# Altium PCB VESC_BMS.PcbDoc (part 4 of 4)
Units mm, origin at the board's own origin, x right, y up, seen from the top; angles counter-clockwise.
Board outline 100 x 75 mm, 4 copper layers (L1, L2, L3, L4), stack 1.446 mm thick; 263 components, 195 nets, 808 pads, 1031 vias.
Unrouted connection lines stored in the file: 1.
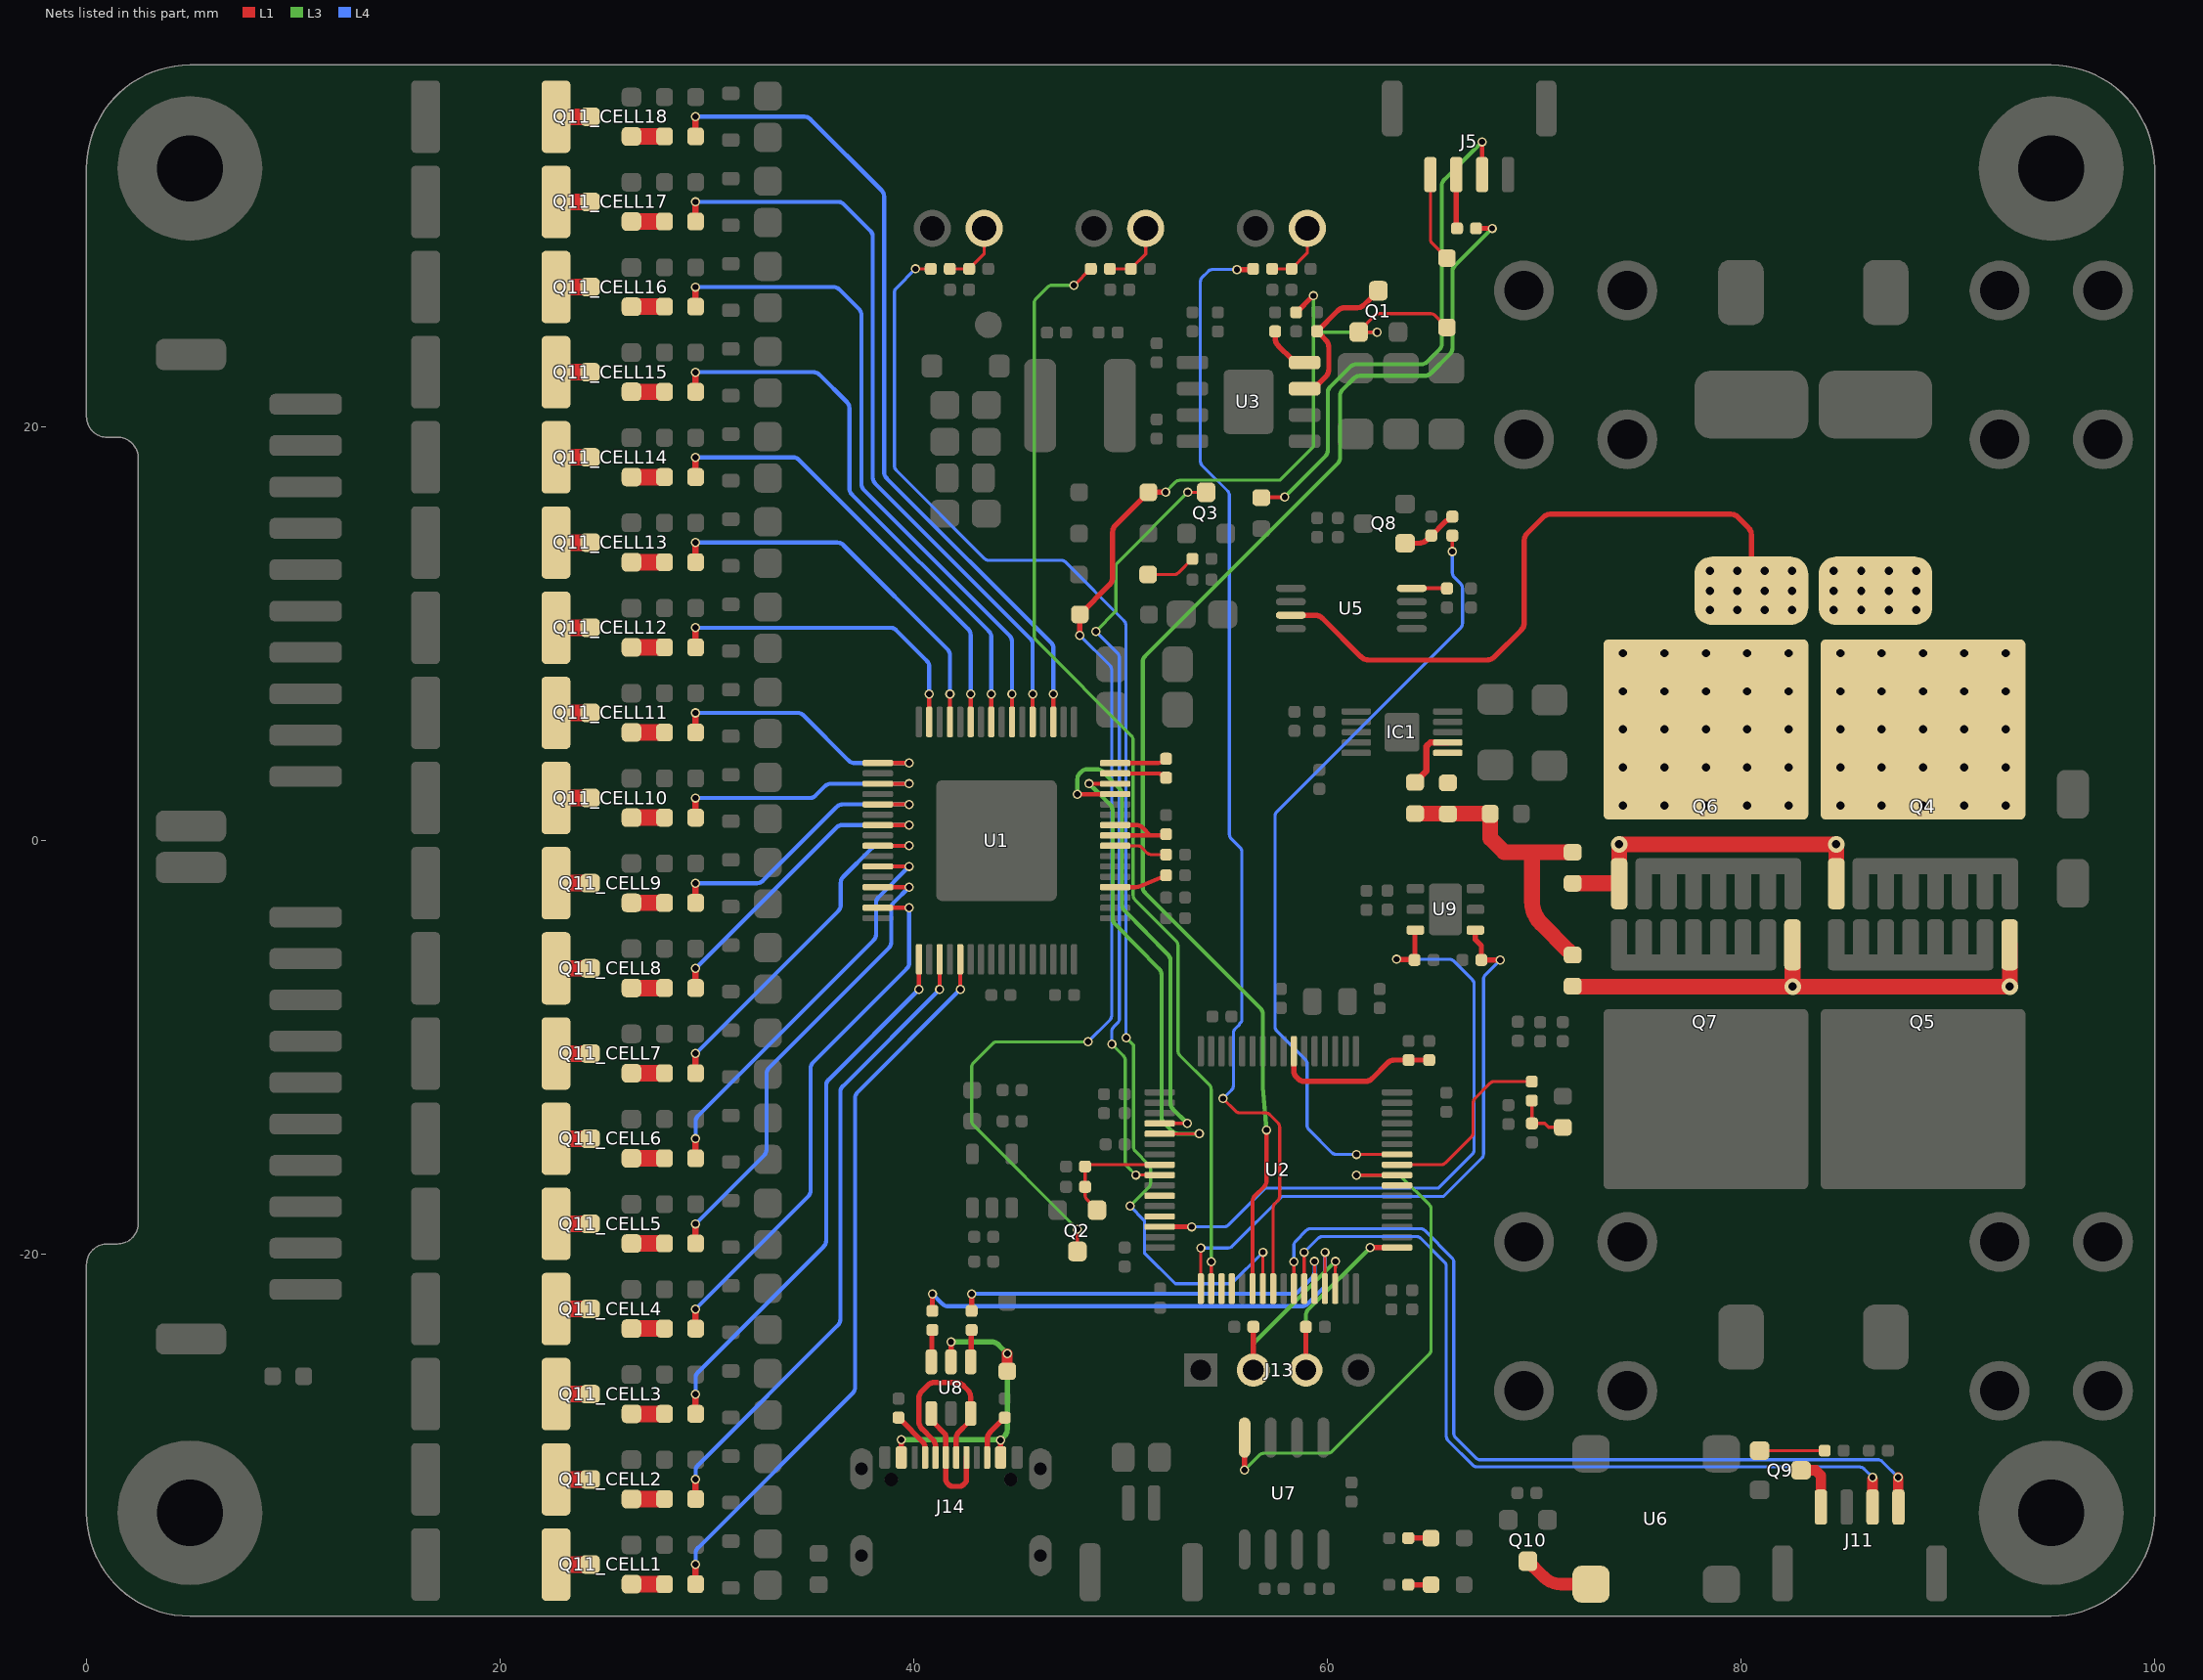
[diagram p5: the nets of this part, all layers, seen from the top]

## Via types
v1: diameter 0.8, hole 0.4, L1 to L4, tented both sides, 496 vias
v2: diameter 0.45, hole 0.3, L1 to L4, tented both sides, 449 vias
v3: diameter 0.6, hole 0.4, L1 to L4, tented both sides, 84 vias
v4: diameter 0.55, hole 0.3, L1 to L4, tented both sides, 2 vias

## Nets (pads, with @x,y where several pads share a name; then routed paths per layer and width w, separated by ;. In a path a pad name is that pad's centre, name@x,y a point inside that pad or via, vN(x,y) a via of type N, cw(c..) or ccw(c..) an arc to the next point about the centre after c; other vN are vias at no path point) (continued)
NetD2_2: D2.2 D4.1 D5.1 Q1.G Q2.D R22.1 | length 72.4
  L1 w0.152: Q2.D@47.909,-19.864 v2(47.909,-18.789) ; Q1.G@61.515,24.588 61.74,24.58 v2(62.41,24.58) ; Q1.G@61.515,24.613 62.289,25.386 cw(c62.503,25.17) 62.503,25.475 64.994,25.475 cw(c64.994,25.17) 65.209,25.386 65.567,25.028 D4.1@65.78,24.815
  L1 w0.254: v2(48.031,9.922) D5.1@48.031,10.934 49.465,12.369 ccw(c49.105,12.727) 49.613,12.727 49.613,14.895 cw(c50.121,14.895) 49.761,15.253 D2.2@51.351,16.843 51.563,16.846 52.117,16.846 ccw(c52.115,17.354) v2(52.176,16.85) ; R22.1@58.49,25.542 58.503,25.542 59.303,26.342 v2(59.328,26.342)
  L3 w0.152: v2(47.909,-18.789) 42.889,-13.768 cw(c43.105,-13.553) 42.8,-13.553 42.8,-10.952 cw(c43.105,-10.952) 42.889,-10.737 43.809,-9.817 cw(c44.023,-10.033) 44.023,-9.729 v2(48.424,-9.729) ; v2(52.176,16.85) 52.663,17.337 cw(c52.878,17.121) 52.878,17.425 57.699,17.425 59.328,19.054 59.328,24.58 ; v2(59.328,26.342) 59.328,24.58 ; v2(62.41,24.58) 59.328,24.58
  L4 w0.152: v2(48.031,9.922) 49.483,8.47 cw(c49.267,8.255) 49.571,8.255 49.571,-8.455 cw(c49.267,-8.455) 49.483,-8.67 v2(48.424,-9.729)
NetD3_2: D3.2 R27.1 | length 2.4
  L1 w0.152: D3.2@51.331,12.866 52.59,12.866 ccw(c52.59,13.17) 52.804,12.954 R27.1@53.476,13.625
NetD4_2: D4.2 J5.4 | length 4.4
  L1 w0.152: J5.4@64.983,32.2 64.983,29.089 ccw(c65.288,29.089) 65.071,28.874 65.567,28.378 D4.2@65.78,28.165
NetD10_2: D10.2 R50.1 | length 1.1
  L1 w0.254: R50.1@63.911,-33.725 D10.2@65.011,-33.725
NetD11_2: D11.2 R51.1 | length 1.1
  L1 w0.254: R51.1@63.911,-35.978 D11.2@65.011,-35.978
NetIC1_6: IC1.6 R38.1
NetIC1_7: IC1.7 R37.1 | length 3.1
  L1 w0.305: R37.1@64.239,2.811 64.242,2.811 64.519,3.088 64.519,3.09 64.797,3.368 64.797,4.564 64.975,4.743 IC1.7@65.823,4.743
NetJ5_3: J5.3 R45.2 | length 2.7
  L1 w0.254: R45.2@66.233,29.601 J5.3@66.233,32.2 J5.3@66.233,32.3
NetJ6_2: J6.2 R14.1 R15.1 | length 3.2
  L1 w0.152: R14.1@57.332,27.64 58.269,27.64 59.028,28.399 J6.2@59.028,29.6
NetJ7_2: J7.2 R10.1 R11.1 | length 3.3
  L1 w0.152: R10.1@49.485,27.645 R11.1@50.498,27.645 51.215,28.363 J7.2@51.215,29.6
NetJ9_2: J9.2 R12.1 R13.1 | length 3.2
  L1 w0.152: R12.1@41.742,27.645 R13.1@42.682,27.645 43.402,28.365 J9.2@43.402,29.6
NetJ11_1: J11.1 Q9.D | length 2.6
  L1 w0.508: Q9.D@82.903,-30.446 83.601,-30.446 83.861,-30.706 J11.1@83.861,-32.225
NetJ11_3: J11.3 U2.43 | length 40.6
  L1 w0.152: U2.43@58.881,-21.661 v2(58.881,-19.9)
  L1 w0.508: J11.3@86.361,-32.225 v2@86.361,-30.864
  L4 w0.152: v2(58.881,-19.9) 59.551,-19.23 cw(c59.766,-19.447) 59.766,-19.142 64.3,-19.142 cw(c64.3,-19.447) 64.516,-19.231 65.661,-20.376 cw(c65.444,-20.59) 65.749,-20.59 65.749,-28.785 ccw(c66.053,-28.785) 65.837,-29 67.031,-30.194 ccw(c67.245,-29.977) 67.245,-30.282 85.725,-30.282 cw(c85.725,-30.587) 85.94,-30.371 v2(86.361,-30.792)
NetJ11_4: J11.4 U2.42 | length 43
  L1 w0.152: v2(58.379,-20.354) 58.379,-20.364 cw(c57.98,-20.386) 58.38,-20.386 58.38,-21.023 U2.42@58.381,-21.661
  L1 w0.508: v2(87.602,-30.792) 87.602,-32.216 J11.4@87.611,-32.225
  L4 w0.152: v2(58.379,-20.354) 58.379,-19.577 cw(c58.684,-19.577) 58.467,-19.362 58.975,-18.855 cw(c59.189,-19.071) 59.189,-18.767 64.497,-18.767 cw(c64.497,-19.071) 64.712,-18.856 66.022,-20.165 cw(c65.805,-20.38) 66.11,-20.38 66.11,-28.651 ccw(c66.415,-28.651) 66.198,-28.866 67.178,-29.845 ccw(c67.392,-29.628) 67.392,-29.933 86.618,-29.933 cw(c86.618,-30.238) 86.833,-30.022 v2(87.602,-30.792)
NetJ14_4: J14.4 R54.1 | length 2.5
  L1 w0.254: R54.1@39.263,-27.9 39.402,-28.039 40.401,-29.039 cw(c40.042,-29.398) 40.55,-29.398 40.55,-29.402 J14.4@40.55,-29.925
NetJ14_5: J14.5 J14.7 U8.3 | length 9.6
  L1 w0.254: J14.5@41.05,-29.825 41.05,-29.402 41.05,-29.302 ccw(c40.542,-29.302) 40.901,-28.943 40.397,-28.439 cw(c40.758,-28.081) 40.25,-28.081 40.25,-26.969 cw(c40.758,-26.969) 40.398,-26.61 40.662,-26.347 cw(c41.02,-26.707) 41.02,-26.199 42.034,-26.199 cw(c42.034,-26.707) 42.394,-26.348 42.601,-26.555 cw(c42.242,-26.914) 42.75,-26.914 42.75,-27.237 U8.3@42.75,-27.7 42.612,-28.163 42.198,-28.577 ccw(c42.558,-28.935) 42.05,-28.935 J14.7@42.05,-29.825
NetJ14_6: J14.6 J14.8 U8.1 | length 5.9
  L1 w0.254: U8.1@40.85,-27.7 40.987,-28.163 41.461,-28.636 cw(c41.245,-28.851) 41.55,-28.851 41.55,-29.451 J14.6@41.55,-29.825 41.55,-30.879 ccw(c41.855,-30.879) 41.638,-31.094 41.681,-31.136 ccw(c41.896,-30.92) 41.896,-31.225 42.199,-31.225 ccw(c42.199,-30.92) 42.414,-31.136 42.461,-31.089 ccw(c42.245,-30.874) 42.55,-30.874 J14.8@42.55,-29.825
NetJ14_10: J14.10 R57.1 | length 2.3
  L1 w0.254: J14.10@43.55,-29.825 43.55,-28.96 cw(c44.058,-28.96) 43.698,-28.602 R57.1@44.4,-27.9
NetQ1_D: Q1.D R23.1 U3.3 | length 7.4
  L1 w0.254: U3.3@58.9,21.846 59.5,22.009 59.924,22.433 ccw(c59.564,22.791) 60.072,22.791 60.072,23.843 ccw(c59.564,23.843) 59.923,24.202 59.639,24.486 R23.1@59.5,24.625 60.494,25.62 cw(c60.853,25.26) 60.853,25.768 61.435,25.768 ccw(c61.435,26.276) 61.793,25.916 Q1.D@62.465,26.588
NetQ2_G: Q2.G R29.1 R31.2 U2.24 | length 6
  L1 w0.152: Q2.G@48.859,-17.864 48.634,-17.614 48.375,-17.354 cw(c48.591,-17.139) 48.286,-17.139 R31.2@48.286,-16.739 48.286,-16.599 48.286,-15.899 R29.1@48.286,-15.76 48.425,-15.673 U2.24@51.893,-15.673
NetQ3_D: Q3.D U2.25 | length 37.9
  L1 w0.152: v2(50.734,-16.165) 50.738,-16.169 51.889,-16.169 U2.25@51.893,-16.173 ; v2(53.256,16.84) 54.133,16.84 Q3.D@54.136,16.843
  L3 w0.152: v2(48.802,10.12) 49.779,11.097 49.779,13.236 cw(c50.084,13.236) 49.868,13.451 v2(53.256,16.84) ; v2(49.576,-9.843) 50.141,-10.408 cw(c49.924,-10.623) 50.229,-10.623 50.229,-15.534 ccw(c50.534,-15.534) 50.318,-15.749 v2(50.734,-16.165)
  L4 w0.152: v2(48.802,10.12) 49.855,9.067 cw(c49.638,8.852) 49.943,8.852 49.943,-8.614 cw(c49.638,-8.614) 49.855,-8.829 49.664,-9.019 ccw(c49.881,-9.234) 49.576,-9.234 v2(49.576,-9.843)
NetQ4_G: Q4.G Q6.G R34.2 | length 16.6
  L1 w0.762: R34.2@71.859,-2.064 74.09,-2.064 Q6.G@74.109,-2.083 ; Q6.G@74.109,-2.086 Q6.G@74.109,-2.083 ; Q4.G@84.601,-2.078 v1(84.601,-0.175) v1(74.109,-0.175) Q6.G@74.109,-2.083
NetQ5_G: Q5.G Q7.G R35.2 | length 25.3
  L1 w0.508: Q7.G@82.491,-5.041 Q7.G@82.495,-5.045 ; v1@82.495,-7.05 v1(82.499,-7.054) ; Q5.G@92.991,-5.041 92.995,-5.045 Q5.G@93.06,-5.11 ; v1@92.995,-7.054 v1(92.999,-7.058)
  L1 w0.762: R35.2@71.842,-7.057 71.84,-7.054 v1(82.499,-7.054) v1@92.995,-7.054 ; v1@82.495,-7.05 Q7.G@82.495,-5.045 ; v1@92.995,-7.054 Q5.G@92.995,-5.045
  L3 w0.508: v1@92.995,-7.054 v1(92.999,-7.058)
NetQ8_G: Q8.G R42.1 R43.1 | length 2.8
  L1 w0.254: Q8.G@63.754,14.38 64.437,14.38 ccw(c64.437,14.888) 64.78,14.514 64.886,14.611 R43.1@65.026,14.745 65.666,15.386 cw(c66.024,15.026) 65.829,15.495 65.905,15.526 R42.1@66.044,15.665
NetQ9_G: Q9.G R47.2 | length 3.1
  L1 w0.152: Q9.G@80.903,-29.496 R47.2@84.045,-29.496
NetQ10_D: Q10.D U6.2 | length 3.5
  L1 w0.6: Q10.D@69.698,-34.842 69.848,-35.017 69.849,-35.018 cw(c69.157,-35.998) 70.004,-35.148 70.455,-35.599 ccw(c71.303,-34.75) 71.303,-35.95 U6.2@72.75,-35.95
NetQ11_CELL1_D: Q11_CELL1.D R60_CELL1.2 | length 1.6
  L1 w0.8: R60_CELL1.2@22.7,-35 Q11_CELL1.D@24.35,-35
NetQ11_CELL1_G: Q11_CELL1.G R59_CELL1.1 | length 1.5
  L1 w0.8: Q11_CELL1.G@26.35,-35.95 R59_CELL1.1@27.898,-35.95
NetQ11_CELL2_D: Q11_CELL2.D R60_CELL2.2 | length 1.6
  L1 w0.8: R60_CELL2.2@22.7,-30.882 Q11_CELL2.D@24.35,-30.882
NetQ11_CELL2_G: Q11_CELL2.G R59_CELL2.1 | length 1.5
  L1 w0.8: Q11_CELL2.G@26.35,-31.832 R59_CELL2.1@27.898,-31.832
NetQ11_CELL3_D: Q11_CELL3.D R60_CELL3.2 | length 1.6
  L1 w0.8: R60_CELL3.2@22.7,-26.765 Q11_CELL3.D@24.35,-26.765
NetQ11_CELL3_G: Q11_CELL3.G R59_CELL3.1 | length 1.5
  L1 w0.8: Q11_CELL3.G@26.35,-27.715 R59_CELL3.1@27.898,-27.715
NetQ11_CELL4_D: Q11_CELL4.D R60_CELL4.2 | length 1.6
  L1 w0.8: R60_CELL4.2@22.7,-22.647 Q11_CELL4.D@24.35,-22.647
NetQ11_CELL4_G: Q11_CELL4.G R59_CELL4.1 | length 1.5
  L1 w0.8: Q11_CELL4.G@26.35,-23.597 R59_CELL4.1@27.898,-23.597
NetQ11_CELL5_D: Q11_CELL5.D R60_CELL5.2 | length 1.6
  L1 w0.8: R60_CELL5.2@22.7,-18.529 Q11_CELL5.D@24.35,-18.529
NetQ11_CELL5_G: Q11_CELL5.G R59_CELL5.1 | length 1.5
  L1 w0.8: Q11_CELL5.G@26.35,-19.479 R59_CELL5.1@27.898,-19.479
NetQ11_CELL6_D: Q11_CELL6.D R60_CELL6.2 | length 1.6
  L1 w0.8: R60_CELL6.2@22.7,-14.412 Q11_CELL6.D@24.35,-14.412
NetQ11_CELL6_G: Q11_CELL6.G R59_CELL6.1 | length 1.5
  L1 w0.8: Q11_CELL6.G@26.35,-15.362 R59_CELL6.1@27.898,-15.362
NetQ11_CELL7_D: Q11_CELL7.D R60_CELL7.2 | length 1.6
  L1 w0.8: R60_CELL7.2@22.7,-10.294 Q11_CELL7.D@24.35,-10.294
NetQ11_CELL7_G: Q11_CELL7.G R59_CELL7.1 | length 1.5
  L1 w0.8: Q11_CELL7.G@26.35,-11.244 R59_CELL7.1@27.898,-11.244
NetQ11_CELL8_D: Q11_CELL8.D R60_CELL8.2 | length 1.6
  L1 w0.8: R60_CELL8.2@22.7,-6.176 Q11_CELL8.D@24.35,-6.176
NetQ11_CELL8_G: Q11_CELL8.G R59_CELL8.1 | length 1.5
  L1 w0.8: Q11_CELL8.G@26.35,-7.126 R59_CELL8.1@27.898,-7.126
NetQ11_CELL9_D: Q11_CELL9.D R60_CELL9.2 | length 1.6
  L1 w0.8: R60_CELL9.2@22.7,-2.059 Q11_CELL9.D@24.35,-2.059
NetQ11_CELL9_G: Q11_CELL9.G R59_CELL9.1 | length 1.5
  L1 w0.8: Q11_CELL9.G@26.35,-3.009 R59_CELL9.1@27.898,-3.009
NetQ11_CELL10_D: Q11_CELL10.D R60_CELL10.2 | length 1.6
  L1 w0.8: R60_CELL10.2@22.7,2.059 Q11_CELL10.D@24.35,2.059
NetQ11_CELL10_G: Q11_CELL10.G R59_CELL10.1 | length 1.5
  L1 w0.8: Q11_CELL10.G@26.35,1.109 R59_CELL10.1@27.898,1.109
NetQ11_CELL11_D: Q11_CELL11.D R60_CELL11.2 | length 1.6
  L1 w0.8: R60_CELL11.2@22.7,6.176 Q11_CELL11.D@24.35,6.176
NetQ11_CELL11_G: Q11_CELL11.G R59_CELL11.1 | length 1.5
  L1 w0.8: Q11_CELL11.G@26.35,5.226 R59_CELL11.1@27.898,5.226
NetQ11_CELL12_D: Q11_CELL12.D R60_CELL12.2 | length 1.6
  L1 w0.8: R60_CELL12.2@22.7,10.294 Q11_CELL12.D@24.35,10.294
NetQ11_CELL12_G: Q11_CELL12.G R59_CELL12.1 | length 1.6
  L1 w0.8: Q11_CELL12.G@26.35,9.344 R59_CELL12.1@27.948,9.344
NetQ11_CELL13_D: Q11_CELL13.D R60_CELL13.2 | length 1.6
  L1 w0.8: R60_CELL13.2@22.7,14.412 Q11_CELL13.D@24.35,14.412
NetQ11_CELL13_G: Q11_CELL13.G R59_CELL13.1 | length 1.6
  L1 w0.8: Q11_CELL13.G@26.35,13.462 R59_CELL13.1@27.948,13.462
NetQ11_CELL14_D: Q11_CELL14.D R60_CELL14.2 | length 1.6
  L1 w0.8: R60_CELL14.2@22.7,18.529 Q11_CELL14.D@24.35,18.529
NetQ11_CELL14_G: Q11_CELL14.G R59_CELL14.1 | length 1.6
  L1 w0.8: Q11_CELL14.G@26.35,17.579 R59_CELL14.1@27.948,17.579
NetQ11_CELL15_D: Q11_CELL15.D R60_CELL15.2 | length 1.6
  L1 w0.8: R60_CELL15.2@22.7,22.647 Q11_CELL15.D@24.35,22.647
NetQ11_CELL15_G: Q11_CELL15.G R59_CELL15.1 | length 1.6
  L1 w0.8: Q11_CELL15.G@26.35,21.697 R59_CELL15.1@27.948,21.697
NetQ11_CELL16_D: Q11_CELL16.D R60_CELL16.2 | length 1.6
  L1 w0.8: R60_CELL16.2@22.7,26.765 Q11_CELL16.D@24.35,26.765
NetQ11_CELL16_G: Q11_CELL16.G R59_CELL16.1 | length 1.6
  L1 w0.8: Q11_CELL16.G@26.35,25.815 R59_CELL16.1@27.948,25.815
NetQ11_CELL17_D: Q11_CELL17.D R60_CELL17.2 | length 1.6
  L1 w0.8: R60_CELL17.2@22.7,30.882 Q11_CELL17.D@24.35,30.882
NetQ11_CELL17_G: Q11_CELL17.G R59_CELL17.1 | length 1.6
  L1 w0.8: Q11_CELL17.G@26.35,29.932 R59_CELL17.1@27.948,29.932
NetQ11_CELL18_D: Q11_CELL18.D R60_CELL18.2 | length 1.6
  L1 w0.8: R60_CELL18.2@22.7,35 Q11_CELL18.D@24.35,35
NetQ11_CELL18_G: Q11_CELL18.G R59_CELL18.1 | length 1.6
  L1 w0.8: Q11_CELL18.G@26.35,34.05 R59_CELL18.1@27.948,34.05
NetR2_2: R2.2 U1.52 | length 2.6
  L1 w0.2: U1.52@49.738,-2.25 50.727,-2.25 ccw(c50.727,-1.742) 50.922,-2.211 52.061,-1.74 R2.2@52.2,-1.677
NetR4_2: R4.2 U1.56 | length 2.6
  L1 w0.152: U1.56@49.738,-0.25 50.814,-0.25 cw(c50.814,-0.555) 51.029,-0.339 51.278,-0.588 ccw(c51.493,-0.372) 51.493,-0.677 R4.2@52.2,-0.677
NetR5_2: R5.2 U1.57 U1.58 | length 4.4
  L1 w0.2: U1.57@49.738,0.25 51.44,0.25 ; U1.58@49.738,0.75 50.376,0.75 50.774,0.75 cw(c50.774,0.35) 51.056,0.634 51.44,0.25 ; R5.2@52.2,0.311 52.139,0.25 51.44,0.25
NetR6_1: R6.1 U1.63 | length 2.5
  L1 w0.2: U1.63@49.738,3.25 50.349,3.25 51.767,3.25 cw(c51.767,2.742) 51.956,3.213 52.061,3.171 R6.1@52.2,3.04
NetR6_2: R6.2 U1.64 | length 2.5
  L1 w0.2: U1.64@49.738,3.75 51.767,3.75 ccw(c51.767,4.258) 51.957,3.787 52.061,3.829 R6.2@52.2,3.96
NetR8_1: R8.1 R9.1 R16.2 | length 2.7
  L1 w0.152: R8.1@69.883,-12.57 69.889,-12.575 69.889,-13.668 R9.1@69.894,-13.673 70.508,-13.673 70.696,-13.862 R16.2@71.383,-13.862
NetR8_2: R8.2 U2.57 | length 9.1
  L1 w0.152: U2.57@63.369,-15.673 65.484,-15.673 ccw(c65.484,-15.368) 65.699,-15.584 66.96,-14.323 ccw(c66.744,-14.109) 67.049,-14.109 67.049,-12.677 cw(c67.353,-12.677) 67.137,-12.462 67.861,-11.738 cw(c68.075,-11.955) 68.075,-11.65 R8.2@69.883,-11.65
NetR10_2: R10.2 U2.34 | length 54.6
  L1 w0.152: v2(47.746,26.852) 47.759,26.852 48.552,27.645 R10.2@48.565,27.645 ; U2.34@54.381,-21.661 v2(54.381,-20.354)
  L3 w0.152: v2(47.746,26.852) 46.684,26.852 ccw(c46.684,26.547) 46.469,26.763 45.914,26.208 ccw(c46.13,25.993) 45.825,25.993 45.825,9.905 ccw(c46.13,9.905) 45.914,9.69 50.518,5.086 cw(c50.302,4.871) 50.607,4.871 50.607,-2.643 ccw(c50.911,-2.643) 50.695,-2.857 52.685,-4.848 cw(c52.469,-5.063) 52.774,-5.063 52.774,-10.162 ccw(c53.079,-10.162) 52.862,-10.377 54.292,-11.807 cw(c54.076,-12.022) 54.381,-12.022 v2(54.381,-20.354)
NetR12_2: R12.2 U2.39 | length 65.4
  L1 w0.152: v2(40.086,27.644) R12.2@40.822,27.645 ; U2.39@56.881,-21.661 v2(56.881,-19.9)
  L3 w0.152: v2(50.265,-9.526) 50.625,-9.885 50.625,-14.812 ccw(c50.93,-14.812) 50.714,-15.027 51.361,-15.675 cw(c51.145,-15.89) 51.45,-15.89 51.45,-16.554 cw(c51.145,-16.554) 51.361,-16.769 v2(50.458,-17.673)
  L4 w0.152: v2(40.086,27.644) 39.151,26.709 ccw(c39.367,26.494) 39.062,26.494 39.062,18.126 ccw(c39.367,18.126) 39.151,17.911 43.421,13.64 ccw(c43.636,13.857) 43.636,13.552 47.122,13.552 cw(c47.122,13.247) 47.337,13.463 50.166,10.635 cw(c49.95,10.42) 50.255,10.42 50.255,-9.446 ccw(c50.559,-9.445) v2(50.265,-9.526) ; v2(50.458,-17.673) 51.154,-18.37 51.154,-19.936 52.646,-21.428 55.353,-21.428 v2(56.881,-19.9)
NetR14_2: R14.2 U2.40 | length 54.7
  L1 w0.152: v2(54.956,-12.475) 55.56,-13.079 ccw(c55.775,-12.863) 55.775,-13.168 57.01,-13.168 cw(c57.01,-13.473) 57.224,-13.257 57.601,-13.633 cw(c57.385,-13.848) 57.69,-13.848 57.69,-17.19 cw(c57.385,-17.19) 57.601,-17.405 57.47,-17.536 ; U2.40@57.381,-21.661 57.381,-17.751 cw(c57.686,-17.751) 57.47,-17.536
  L1 w0.254: v2(55.626,27.612) R14.2@56.412,27.612
  L4 w0.152: v2(54.956,-12.475) 55.367,-12.065 ccw(c55.151,-11.85) 55.455,-11.85 55.455,-9.31 cw(c55.76,-9.31) 55.544,-9.095 55.748,-8.891 55.748,-8.857 55.845,-8.759 ccw(c55.562,-8.646) 55.867,-8.646 55.867,-0.549 ccw(c55.562,-0.549) 55.778,-0.334 55.353,0.091 cw(c55.569,0.306) 55.264,0.306 55.264,16.693 ccw(c54.959,16.693) 55.176,16.907 53.946,18.137 cw(c54.162,18.352) 53.857,18.352 53.857,27.019 cw(c54.162,27.019) 53.945,27.234 54.236,27.524 cw(c54.451,27.307) 54.451,27.612 v2(55.626,27.612)
NetR25_2: R25.2 U3.4 | length 2.3
  L1 w0.254: R25.2@57.474,24.622 57.474,24.292 ccw(c57.982,24.292) 57.622,23.933 58.29,23.265 ccw(c58.649,23.624) 58.3,23.256 U3.4@58.9,23.116
NetR34_1: R34.1 R35.1 R37.2 R38.2 R39.2 | length 14.8
  L1 w0.762: R37.2@64.239,1.307 64.29,1.298 65.78,1.298 R38.2@65.83,1.289 ; R38.2@65.84,1.298 R39.2@67.873,1.298 67.873,0.114 68.547,-0.56 69.894,-0.56 ; R35.1@71.859,-5.531 71.809,-5.509 ccw(c70.569,-6.395) 71.648,-5.319 70.339,-4.01 cw(c71.418,-2.934) 69.894,-2.934 69.894,-0.56 ; R34.1@71.859,-0.56 69.894,-0.56
NetR41_1: R41.1 U5.8 | length 1.7
  L1 w0.2: U5.8@64.084,12.198 R41.1@65.78,12.198
NetR42_2: R42.2 U2.58 | length 38
  L1 w0.152: v2(61.407,-15.173) U2.58@63.369,-15.173 ; v2(66.044,13.977) R42.2@66.044,14.745
  L4 w0.152: v2(61.407,-15.173) 60.428,-15.173 cw(c60.428,-14.868) 60.213,-15.085 59.106,-13.977 cw(c59.323,-13.763) 59.018,-13.763 59.018,-10.788 ccw(c58.713,-10.788) 58.929,-10.573 57.553,-9.197 cw(c57.77,-8.983) 57.465,-8.983 57.465,1.179 cw(c57.77,1.179) 57.554,1.394 66.443,10.283 ccw(c66.227,10.498) 66.531,10.498 66.531,12.207 ccw(c66.227,12.207) 66.442,12.423 66.134,12.731 cw(c66.349,12.947) 66.044,12.947 v2(66.044,13.977)
NetR45_1: R45.1 U2.38 | length 63.6
  L1 w0.2: U2.38@56.381,-21.661 56.381,-17.454 cw(c56.781,-17.454) 56.498,-17.172 56.944,-16.725 ccw(c56.661,-16.443) 57.061,-16.443 v2(57.061,-13.993)
  L1 w0.254: R45.1@67.19,29.601 v2(67.969,29.601)
  L3 w0.2: v2(57.061,-13.993) 56.882,-11.935 cw(c57.28,-11.902) 56.88,-11.902 56.88,-8.387 ccw(c56.48,-8.387) 56.763,-8.105 51.188,-2.529 cw(c51.471,-2.247) 51.071,-2.247 51.071,8.641 cw(c51.471,8.641) 51.188,8.923 60.498,18.234 ccw(c60.215,18.516) 60.615,18.516 60.615,21.518 cw(c61.015,21.518) 60.732,21.801 61.289,22.358 cw(c61.571,22.074) 61.571,22.474 64.716,22.474 ccw(c64.716,22.874) 64.999,22.591 65.932,23.524 ccw(c65.648,23.806) 66.048,23.806 66.048,27.515 cw(c66.448,27.515) 66.165,27.798 v2(67.969,29.601)
NetR55_1: R55.1 U8.6 | length 1.5
  L1 w0.254: U8.6@40.85,-25.2 40.875,-24.737 40.875,-23.799 R55.1@40.9,-23.66
NetR56_1: R56.1 U8.4 | length 1.5
  L1 w0.254: U8.4@42.75,-25.2 42.775,-24.737 42.775,-23.799 R56.1@42.8,-23.66
NetR61_1: R61.1 U2.33 U9.1 | length 29.7
  L1 w0.152: U2.33@53.881,-21.66 v2(53.88,-19.696)
  L1 w0.254: U9.1@67.156,-4.327 67.156,-4.786 67.446,-5.077 R61.1@67.446,-5.773 v2(68.349,-5.773)
  L4 w0.152: v2(53.88,-19.696) 55.193,-19.696 ccw(c55.193,-19.391) 55.408,-19.607 57.813,-17.203 65.617,-17.203 67.461,-15.359 ccw(c67.245,-15.144) 67.55,-15.144 67.55,-6.698 cw(c67.855,-6.698) 67.639,-6.483 v2(68.349,-5.773)
NetR62_1: R62.1 U2.30 U9.6 | length 31.4
  L1 w0.254: U2.30@51.893,-18.673 v2(53.438,-18.673) ; v2(63.353,-5.738) 63.37,-5.755 64.194,-5.755 R62.1@64.211,-5.773 64.233,-5.751 64.233,-4.349 U9.6@64.256,-4.327
  L4 w0.152: v2(53.438,-18.673) 54.998,-18.673 ccw(c54.998,-18.368) 55.213,-18.584 56.989,-16.808 65.363,-16.808 67.007,-15.165 ccw(c66.791,-14.95) 67.095,-14.95 67.095,-6.943 ccw(c66.791,-6.943) 67.007,-6.728 66.105,-5.827 ccw(c65.891,-6.043) 65.891,-5.738 v2(63.353,-5.738)
NetU2_29: U2.29
NetU2_35: U2.35
NetU2_36: U2.36
NetU2_56: U2.56 U7.8 | length 26.1
  L1 w0.152: v2(61.407,-16.173) U2.56@63.369,-16.173
  L1 w0.254: v2(55.998,-30.428) U7.8@55.998,-28.865
  L3 w0.152: v2(55.998,-30.428) 56.719,-29.707 cw(c56.933,-29.923) 56.933,-29.619 60.015,-29.619 ccw(c60.015,-29.314) 60.23,-29.53 64.921,-24.838 ccw(c64.705,-24.623) 65.01,-24.623 65.01,-17.807 ccw(c64.705,-17.807) 64.921,-17.592 63.591,-16.262 ccw(c63.376,-16.478) 63.376,-16.173 v2(61.407,-16.173)
PRECHARGEENABLE: U2.55
PUSHBUTTON: J5.2 R28.2 | length 25.7
  L1 w0.2: R28.2@56.806,16.581 56.826,16.6 57.921,16.6 v2(57.941,16.62) ; J5.2@67.483,32.3 v2(67.483,33.786)
  L3 w0.2: v2(57.941,16.62) 59.904,18.583 ccw(c59.62,18.865) 60.02,18.865 60.02,21.656 cw(c60.42,21.656) 60.137,21.939 61.112,22.913 cw(c61.394,22.63) 61.394,23.03 64.544,23.03 ccw(c64.544,23.43) 64.826,23.147 65.414,23.735 ccw(c65.131,24.017) 65.531,24.017 65.531,31.668 cw(c65.931,31.668) 65.647,31.951 v2(67.483,33.786)
R\S\T\: C12.2 R18.1 U2.7 | length 8.2
  L1 w0.254: U2.7@58.381,-10.185 58.381,-11.151 ccw(c58.781,-11.151) 58.498,-11.433 58.585,-11.52 ccw(c58.867,-11.237) 58.867,-11.637 61.859,-11.637 ccw(c61.859,-11.237) 62.141,-11.52 62.934,-10.727 cw(c63.217,-11.01) 63.217,-10.61 64.788,-10.61 R18.1@64.927,-10.61
S1: R59_CELL1.2 U1.37 | length 35.5
  L1 w0.2: v2(42.25,-7.194) U1.37@42.25,-5.738
  L1 w0.3: R59_CELL1.2@29.452,-35.95 v2(29.452,-35)
  L4 w0.2: v2(29.452,-35) 29.452,-34.477 cw(c29.852,-34.477) 29.569,-34.194 37.046,-26.717 ccw(c36.763,-26.434) 37.163,-26.434 37.163,-12.447 cw(c37.563,-12.447) 37.28,-12.164 v2(42.25,-7.194)
S2: R59_CELL2.2 U1.35 | length 30.9
  L1 w0.2: v2(41.25,-7.194) U1.35@41.25,-5.738
  L1 w0.3: R59_CELL2.2@29.452,-31.832 29.452,-31.601 v2(29.452,-30.882)
  L4 w0.2: v2(29.452,-30.882) 29.452,-30.475 cw(c29.852,-30.475) 29.569,-30.193 36.333,-23.429 ccw(c36.049,-23.146) 36.449,-23.146 36.449,-12.16 cw(c36.849,-12.16) 36.566,-11.878 v2(41.25,-7.194)
S3: R59_CELL3.2 U1.33 | length 26.3
  L1 w0.2: v2(40.25,-7.194) U1.33@40.25,-5.738
  L1 w0.3: R59_CELL3.2@29.452,-27.664 29.452,-27.484 29.452,-26.773 cw(c30.052,-26.776) v2(29.452,-26.765)
  L4 w0.2: v2(29.452,-26.765) 29.452,-25.985 cw(c29.852,-25.985) 29.569,-25.702 35.646,-19.625 ccw(c35.363,-19.343) 35.763,-19.343 35.763,-11.847 cw(c36.163,-11.847) 35.879,-11.565 v2(40.25,-7.194)
S4: R59_CELL4.2 U1.31 | length 26.1
  L1 w0.2: U1.31@38.262,-3.25 38.9,-3.248 39.445,-3.248 v2(39.781,-3.246)
  L1 w0.3: R59_CELL4.2@29.452,-23.597 29.452,-22.657 cw(c30.052,-22.659) v2(29.452,-22.647)
  L4 w0.2: v2(29.452,-22.647) 34.896,-17.203 ccw(c34.612,-16.921) 35.012,-16.921 35.012,-11.005 cw(c35.412,-11.005) 35.129,-10.723 39.662,-6.19 ccw(c39.379,-5.908) 39.779,-5.908 39.779,-3.285 cw(c40.179,-3.287) v2(39.781,-3.246)
S5: R59_CELL5.2 U1.29 | length 23
  L1 w0.2: U1.29@38.262,-2.25 v2(39.779,-2.25)
  L1 w0.3: R59_CELL5.2@29.452,-19.479 29.452,-19.249 v2(29.452,-18.529)
  L4 w0.2: v2(29.452,-18.529) 32.766,-15.215 ccw(c32.483,-14.932) 32.883,-14.932 32.883,-11.272 cw(c33.283,-11.272) 33,-10.99 38.793,-5.196 ccw(c38.51,-4.914) 38.91,-4.914 38.91,-3.284 cw(c39.31,-3.284) 39.027,-3.002 v2(39.779,-2.25)
S6: R59_CELL6.2 U1.27 | length 19.9
  L1 w0.2: U1.27@38.262,-1.25 v2(39.779,-1.25)
  L1 w0.3: R59_CELL6.2@29.452,-15.362 29.452,-15.131 v2(29.452,-14.412)
  L4 w0.2: v2(29.452,-14.412) 29.452,-13.588 cw(c29.852,-13.588) 29.569,-13.306 38.058,-4.817 ccw(c37.774,-4.535) 38.174,-4.535 38.174,-3.02 cw(c38.574,-3.02) 38.291,-2.738 v2(39.779,-1.25)
S7: R59_CELL7.2 U1.25 | length 17.7
  L1 w0.2: U1.25@38.262,-0.25 v2(39.779,-0.25)
  L1 w0.3: R59_CELL7.2@29.452,-11.244 v2(29.452,-10.294)
  L4 w0.2: v2(29.452,-10.294) 36.354,-3.392 ccw(c36.071,-3.11) 36.471,-3.11 36.471,-2.036 cw(c36.871,-2.036) 36.587,-1.753 37.974,-0.367 cw(c38.256,-0.65) 38.256,-0.25 v2(39.779,-0.25)
S8: R59_CELL8.2 U1.23 | length 15.6
  L1 w0.2: U1.23@38.262,0.75 v2(39.779,0.75)
  L1 w0.3: R59_CELL8.2@29.452,-7.126 v2(29.452,-6.176)
  L4 w0.2: v2(29.452,-6.176) 36.261,0.633 cw(c36.544,0.35) 36.544,0.75 v2(39.779,0.75)
S9: R59_CELL9.2 U1.21 | length 14.3
  L1 w0.2: U1.21@38.262,1.75 v2(39.779,1.75)
  L1 w0.3: R59_CELL9.2@29.452,-3.009 v2(29.452,-2.059)
  L4 w0.2: v2(29.452,-2.059) 32.422,-2.059 ccw(c32.422,-1.659) 32.704,-1.942 36.28,1.633 cw(c36.562,1.35) 36.562,1.75 v2(39.779,1.75)
S10: R59_CELL10.2 U1.19 | length 13
  L1 w0.2: U1.19@38.262,2.75 v2(39.779,2.75)
  L1 w0.3: R59_CELL10.2@29.452,1.109 v2(29.452,2.059)
  L4 w0.2: v2(29.452,2.059) 34.966,2.059 ccw(c34.966,2.459) 35.248,2.176 35.706,2.633 cw(c35.988,2.35) 35.988,2.75 v2(39.779,2.75)
S11: R59_CELL11.2 U1.17 | length 13.8
  L1 w0.2: U1.17@38.262,3.75 v2(39.779,3.75)
  L1 w0.3: R59_CELL11.2@29.452,5.226 v2(29.452,6.176)
  L4 w0.2: v2(29.452,6.176) 34.386,6.176 cw(c34.386,5.776) 34.668,6.06 36.861,3.866 ccw(c37.143,4.15) 37.143,3.75 v2(39.779,3.75)
S12: R59_CELL12.2 U1.15 | length 15.8
  L1 w0.2: U1.15@40.75,5.738 v2(40.75,7.084)
  L1 w0.3: R59_CELL12.2@29.452,9.344 v2(29.452,10.294)
  L4 w0.2: v2(29.452,10.294) 38.862,10.294 cw(c38.862,9.894) 39.145,10.177 40.633,8.689 cw(c40.35,8.406) 40.75,8.406 v2(40.75,7.084)
S13: R59_CELL13.2 U1.13 | length 18.8
  L1 w0.2: U1.13@41.75,5.738 v2(41.75,7.084)
  L1 w0.3: R59_CELL13.2@29.452,13.462 v2(29.452,14.412)
  L4 w0.2: v2(29.452,14.412) 36.305,14.412 cw(c36.305,14.012) 36.587,14.295 41.633,9.25 cw(c41.35,8.967) 41.75,8.967 v2(41.75,7.084)
S14: R59_CELL14.2 U1.11 | length 22.1
  L1 w0.2: U1.11@42.75,5.738 v2(42.75,7.084)
  L1 w0.3: R59_CELL14.2@29.452,17.579 v2(29.452,18.529)
  L4 w0.2: v2(29.452,18.529) 34.165,18.529 cw(c34.165,18.129) 34.447,18.412 42.633,10.227 cw(c42.35,9.944) 42.75,9.944 v2(42.75,7.084)
S15: R59_CELL15.2 U1.9 | length 27.2
  L1 w0.2: U1.9@43.75,5.738 v2(43.75,7.084)
  L1 w0.3: R59_CELL15.2@29.452,21.697 v2(29.452,22.647)
  L4 w0.2: v2(29.452,22.647) 35.156,22.647 cw(c35.156,22.247) 35.438,22.53 36.772,21.196 cw(c36.49,20.913) 36.89,20.913 36.89,17.029 ccw(c37.29,17.029) 37.006,16.747 43.633,10.12 cw(c43.35,9.837) 43.75,9.837 v2(43.75,7.084)
S16: R59_CELL16.2 U1.7 | length 32.2
  L1 w0.2: U1.7@44.75,5.738 v2(44.75,7.084)
  L1 w0.3: R59_CELL16.2@29.452,25.815 v2(29.452,26.765)
  L4 w0.2: v2(29.452,26.765) 36.12,26.765 cw(c36.12,26.365) 36.403,26.647 37.354,25.696 cw(c37.071,25.414) 37.471,25.414 37.471,17.237 ccw(c37.871,17.237) 37.588,16.955 44.633,9.909 cw(c44.35,9.627) 44.75,9.627 v2(44.75,7.084)
S17: R59_CELL17.2 U1.5 | length 36.9
  L1 w0.2: U1.5@45.75,5.738 v2(45.75,7.084)
  L1 w0.3: R59_CELL17.2@29.452,29.932 v2(29.452,30.882)
  L4 w0.2: v2(29.452,30.882) 36.336,30.882 cw(c36.336,30.482) 36.62,30.764 37.904,29.48 cw(c37.621,29.198) 38.021,29.198 38.021,17.551 ccw(c38.421,17.551) 38.137,17.269 45.633,9.773 cw(c45.35,9.491) 45.75,9.491 v2(45.75,7.084)
S18: R59_CELL18.2 U1.3 | length 40.5
  L1 w0.2: U1.3@46.75,5.738 v2(46.75,7.084)
  L1 w0.3: R59_CELL18.2@29.452,34.05 v2(29.452,35)
  L4 w0.2: v2(29.452,35) 34.718,35 cw(c34.718,34.6) 35.001,34.882 38.45,31.433 cw(c38.167,31.151) 38.567,31.151 38.567,17.814 ccw(c38.967,17.814) 38.683,17.531 46.633,9.581 cw(c46.35,9.299) 46.75,9.299 v2(46.75,7.084)
S\S\: U1.61 U2.20 | length 24
  L1 w0.152: U2.20@51.893,-13.673 v2(53.225,-13.673)
  L1 w0.2: v2(47.909,2.236) cw(c47.984,1.843) 47.984,2.243 49.1,2.243 U1.61@49.738,2.25
  L3 w0.2: v2(47.909,2.236) 47.909,2.971 cw(c48.309,2.971) 48.026,3.254 48.104,3.331 cw(c48.386,3.048) 48.386,3.448 48.857,3.448 cw(c48.857,3.048) 49.14,3.332 49.953,2.518 cw(c49.67,2.235) 50.07,2.235 50.07,-3.096 ccw(c50.47,-3.096) 50.185,-3.376 52.302,-5.528 cw(c52.017,-5.809) 52.417,-5.809 52.417,-12.699 ccw(c52.817,-12.699) 52.534,-12.982 v2(53.225,-13.673)
SCK: U1.62 U2.21 | length 22.9
  L1 w0.152: U2.21@51.893,-14.173 v2(53.806,-14.173)
  L1 w0.2: v2(48.474,2.75) 49.1,2.75 U1.62@49.738,2.75
  L3 w0.2: v2(48.474,2.75) 48.48,2.746 cw(c48.266,2.409) 48.549,2.691 49.501,1.739 cw(c49.218,1.456) 49.618,1.456 49.618,-3.752 ccw(c50.018,-3.752) 49.733,-4.033 51.867,-6.203 cw(c51.582,-6.483) 51.982,-6.483 51.982,-13.366 ccw(c52.382,-13.366) 52.099,-13.649 52.506,-14.056 ccw(c52.789,-13.773) 52.789,-14.173 v2(53.806,-14.173)
SWCLK: J13.3 R49.1 U2.49 | length 10.6
  L1 w0.254: J13.3@58.96,-25.6 R49.1@58.96,-23.509 ; v2(62.075,-19.673) U2.49@63.369,-19.673
  L3 w0.2: J13.3@58.96,-25.6 58.96,-22.953 cw(c59.36,-22.953) 59.077,-22.671 v2(62.075,-19.673)
SWDIO: J13.2 R46.2 U2.46 | length 10.3
  L1 w0.152: U2.46@60.381,-21.661 60.383,-21.023 v2(60.385,-20.347)
  L1 w0.254: J13.2@56.42,-25.6 R46.2@56.42,-23.509
  L3 w0.2: J13.2@56.42,-25.6 56.42,-24.478 cw(c56.82,-24.478) 56.537,-24.196 v2(60.385,-20.347)
SWITCHENABLE: U2.27
USB_DM: R56.2 U2.44 | length 19.7
  L1 w0.152: U2.44@59.381,-21.661 v2(59.381,-20.347)
  L1 w0.254: R56.2@42.8,-22.74 v2(42.8,-21.915)
  L4 w0.2: v2(42.8,-21.915) 58.317,-21.915 ccw(c58.317,-21.515) 58.599,-21.798 59.264,-21.133 ccw(c58.981,-20.851) 59.381,-20.851 v2(59.381,-20.347)
USB_DP: R55.2 U2.45 | length 23.8
  L1 w0.152: U2.45@59.881,-21.661 59.883,-21.023 v2(59.885,-19.9)
  L1 w0.254: R55.2@40.9,-22.74 40.9,-22.601 40.9,-21.919 cw(c41.408,-21.92) v2(40.9,-21.915)
  L4 w0.2: v2(40.9,-21.915) 41.384,-22.398 ccw(c41.666,-22.115) 41.666,-22.515 58.76,-22.515 ccw(c58.76,-22.115) 59.042,-22.398 59.768,-21.672 ccw(c59.485,-21.39) 59.885,-21.39 v2(59.885,-19.9)
VBATTSENSED: Q4.D Q6.D R32.1 R33.1 U5.3 | length 31.7
  L1 w0.254: U5.3@58.232,10.898 59.407,10.898 cw(c59.407,10.39) 59.765,10.75 61.639,8.876 ccw(c61.998,9.236) 61.998,8.728 67.711,8.728 ccw(c67.711,9.236) 68.07,8.876 69.373,10.179 ccw(c69.013,10.537) 69.521,10.537 69.521,14.505 cw(c70.029,14.505) 69.669,14.864 70.438,15.633 cw(c70.796,15.273) 70.796,15.781 79.498,15.781 cw(c79.498,15.273) 79.856,15.633 80.352,15.137 cw(c79.992,14.778) 80.5,14.778 R33.1@80.5,12.079
  other v1: 74.3,1.687 76.3,1.687 78.3,1.687 80.3,1.687 82.3,1.687 84.8,1.687 86.8,1.687 88.8,1.687 90.8,1.687 92.8,1.687 74.3,3.53 76.3,3.53 78.3,3.53 80.3,3.53 82.3,3.53 84.8,3.53 86.8,3.53 88.8,3.53 90.8,3.53 92.8,3.53 74.3,5.373 76.3,5.373 78.3,5.373 80.3,5.373 82.3,5.373 84.8,5.373 86.8,5.373 88.8,5.373 90.8,5.373 92.8,5.373 74.3,7.216 76.3,7.216 78.3,7.216 80.3,7.216 82.3,7.216 84.8,7.216 86.8,7.216 88.8,7.216 90.8,7.216 92.8,7.216 74.3,9.059 76.3,9.059 78.3,9.059 80.3,9.059 82.3,9.059 84.8,9.059 86.8,9.059 88.8,9.059 90.8,9.059 92.8,9.059 78.49,11.145 79.819,11.145 81.149,11.145 82.478,11.145 84.486,11.145 85.815,11.145 87.144,11.145 88.474,11.145 78.49,12.079 79.819,12.079 81.149,12.079 82.478,12.079 84.486,12.079 85.815,12.079 87.144,12.079 88.474,12.079 78.49,13.044 79.819,13.044 81.149,13.044 82.478,13.044 84.486,13.044 85.815,13.044 87.144,13.044 88.474,13.044
VBUS: D12.1 J14.2 J14.11 U8.5 | length 15.6
  L1 w0.254: v2(39.402,-28.961) J14.2@39.401,-29.824 ; U8.5@41.8,-25.2 v2(41.8,-24.233) ; J14.11@44.2,-29.825 v2(44.2,-28.986) ; J14.2@39.4,-29.825 J14.2@39.401,-29.824
  L1 w0.508: D12.1@44.52,-25.656 v2(44.52,-24.8)
  L3 w0.254: v2(39.402,-28.961) 39.414,-28.973 44.188,-28.973 v2(44.2,-28.986) 44.372,-28.814 ccw(c44.012,-28.456) 44.52,-28.456 v2(44.52,-24.8) 44.102,-24.381 ccw(c43.743,-24.741) 43.743,-24.233 v2(41.8,-24.233)
pads on no net: IC1.10 J14. J14.3 J14.9 U1.39 U1.41 U1.42 U1.43 U1.44 U1.45 U1.46 U1.47 U1.49 U2.1 U2.2 U2.5 U2.6 U2.15 U2.37 U2.41 U2.50 U2.54 U2.59 U3.6 U4.4 U5.1 U6.3 U6.4 U9.3 U9.4

## Polygon pours and split planes (outlines as drawn)
GND on L4 "GND_L04_P140" (solid, remove dead copper, pour order 140): 0,-32.5 0,-16 cw(c1,-16) 1,-15 1.5,-15 ccw(c1.5,-14) 2.5,-14 2.5,14 ccw(c1.5,14) 1.5,15 1,15 cw(c1,16) 0,16 0,32.5 cw(c5,32.5) 5,37.5 95,37.5 cw(c95,32.5) 100,32.5 100,-32.5 cw(c95,-32.5) 95,-37.5 5,-37.5 cw(c5,-32.5)
NetC34_2 on L4 "NONET_L01_P-001" (solid, pour order 135): 73.644,0.222 93.355,0.222 cw(c93.355,-0.676) 94.252,-0.676 94.252,-6.675 cw(c93.463,-6.675) 93.463,-7.465 73.632,-7.465 cw(c73.632,-6.762) 72.929,-6.762 72.929,-0.494 cw(c73.644,-0.494)
LoadOut on L4 "NONET_L01_P-001" (solid, remove dead copper, pour order 123): 91.125,-17.45 93.35,-17.45 ccw(c93.35,-16.655) 94.145,-16.655 94.145,-8.279 ccw(c93.603,-8.279) 93.603,-7.737 73.626,-7.737 ccw(c73.626,-8.313) 73.05,-8.313 73.05,-14.925 cw(c72.004,-14.925) 72.004,-15.971 68.264,-15.971 ccw(c68.264,-16.981) 67.254,-16.981 67.254,-27.891 ccw(c67.935,-27.891) 67.935,-28.572 88.952,-28.572 ccw(c88.952,-27.604) 89.92,-27.604 89.92,-18.654 cw(c91.125,-18.654)
BATT+ on L4 "NONET_L01_P-001" (solid, remove dead copper, pour order 138): 89.527,27.568 89.527,18.478 cw(c88.301,18.478) 88.301,17.252 68.723,17.252 cw(c68.723,18.348) 67.627,18.348 67.627,27.815 cw(c68.512,27.815) 68.512,28.7 88.395,28.7 cw(c88.395,27.568)
VBATTSENSED on L4 "NONET_L01_P-001" (solid, remove dead copper, pour order 131): 72.903,1.266 72.903,13.99 cw(c73.727,13.99) 73.727,14.814 93.33,14.814 cw(c93.33,13.891) 94.252,13.891 94.252,1.426 cw(c93.329,1.426) 93.329,0.502 73.668,0.502 cw(c73.668,1.266)
GND on L1 "GND_L01_P148" (solid, remove dead copper, pour order 148): 0,-32.5 0,-16 cw(c1,-16) 1,-15 1.5,-15 ccw(c1.5,-14) 2.5,-14 2.5,14 ccw(c1.5,14) 1.5,15 1,15 cw(c1,16) 0,16 0,32.5 cw(c5,32.5) 5,37.5 95,37.5 cw(c95,32.5) 100,32.5 100,-32.5 cw(c95,-32.5) 95,-37.5 5,-37.5 cw(c5,-32.5)
NetC34_2 on L1 "NONET_L01_P-001" (solid, remove dead copper, pour order 147): 96.943,-3.128 96.943,-0.933 ccw(c96.612,-0.933) 96.612,-0.602 93.923,-0.602 93.923,-3.477 96.594,-3.477 ccw(c96.594,-3.128)
NetC34_2 on L1 "NONET_L01_P-001" (solid, pour order 134): 73.644,0.222 93.355,0.222 cw(c93.355,-0.676) 94.252,-0.676 94.252,-6.675 cw(c93.463,-6.675) 93.463,-7.465 73.632,-7.465 cw(c73.632,-6.762) 72.929,-6.762 72.929,-0.494 cw(c73.644,-0.494)
NetIC1_6 on L1 "NONET_L01_P-001" (solid, remove dead copper, pour order 144): 65.307,2.288 66.421,2.288 ccw(c66.421,2.517) 66.65,2.517 66.65,4.309 ccw(c66.53,4.309) 66.53,4.43 65.176,4.43 ccw(c65.176,4.316) 65.062,4.316 65.062,2.533 ccw(c65.307,2.533)
NetC34_2 on L1 "NONET_L01_P-001" (solid, remove dead copper, pour order 145): 64.879,5.137 64.879,5.317 cw(c64.994,5.317) 64.994,5.433 68.725,5.433 cw(c68.725,5.084) 69.074,5.084 69.074,3.043 cw(c68.774,3.043) 68.774,2.743 67.4,2.743 cw(c67.4,2.983) 67.16,2.983 67.16,4.816 ccw(c66.932,4.816) 66.932,5.043 64.972,5.043 cw(c64.972,5.137)
NetC34_1 on L1 "NONET_L01_P-001" (solid, remove dead copper, pour order 146): 64.877,5.601 64.877,5.83 cw(c64.985,5.83) 64.985,5.938 66.729,5.938 ccw(c66.729,6.284) 67.076,6.284 67.076,7.414 cw(c67.408,7.414) 67.408,7.746 68.824,7.746 cw(c68.824,7.434) 69.137,7.434 69.137,5.938 cw(c68.725,5.938) 68.725,5.526 64.952,5.526 cw(c64.952,5.601)
NetC23_2 on L1 "NONET_L01_P-001" (solid, remove dead copper, pour order 118): 66.829,20.691 66.829,18.588 cw(c66.612,18.588) 66.612,18.371 60.271,18.371 cw(c60.271,18.594) 60.048,18.594 60.048,19.735 ccw(c59.718,19.735) 59.718,20.065 58.165,20.065 cw(c58.165,20.22) 58.01,20.22 58.01,20.843 cw(c58.202,20.843) 58.202,21.035 66.485,21.035 cw(c66.485,20.691)
LoadOut on L1 "NONET_L01_P-001" (solid, remove dead copper, pour order 129): 89.427,-21.553 84.944,-21.553 ccw(c84.944,-22.41) 84.087,-22.41 84.087,-27.898 cw(c83.412,-27.898) 83.412,-28.572 67.935,-28.572 cw(c67.935,-27.891) 67.254,-27.891 67.254,-16.981 cw(c68.264,-16.981) 68.264,-15.971 72.004,-15.971 ccw(c72.004,-14.925) 73.05,-14.925 73.05,-8.313 cw(c73.626,-8.313) 73.626,-7.737 93.603,-7.737 cw(c93.603,-8.279) 94.145,-8.279 94.145,-16.655 cw(c93.35,-16.655) 93.35,-17.45 91.125,-17.45 ccw(c91.125,-18.654) 89.92,-18.654 89.92,-21.059 cw(c89.427,-21.059)
NetC1_2 on L1 "NONET_L01_P-001" (solid, remove dead copper, pour order 95): 47.837,9.455 50.855,9.455 cw(c50.855,9.154) 51.156,9.154 51.156,5.253 cw(c50.764,5.253) 50.764,4.861 47.68,4.861 cw(c47.68,5.015) 47.527,5.015 47.527,9.145 cw(c47.837,9.145)
BATT+ on L1 "NONET_L01_P-001" (solid, remove dead copper, pour order 93): 84.4,27.861 84.4,25.324 ccw(c85.171,25.324) 85.171,24.552 89.035,24.552 cw(c89.035,24.061) 89.527,24.061 89.527,18.478 cw(c88.301,18.478) 88.301,17.252 68.723,17.252 cw(c68.723,18.348) 67.627,18.348 67.627,27.815 cw(c68.512,27.815) 68.512,28.7 83.561,28.7 cw(c83.561,27.861)
VBATTSENSED on L1 "NONET_L01_P-001" (solid, remove dead copper, pour order 133): 72.903,1.266 72.903,13.562 cw(c74.085,13.562) 74.085,14.743 92.776,14.743 cw(c92.776,13.267) 94.252,13.267 94.252,1.426 cw(c93.329,1.425) 93.329,0.502 73.668,0.502 cw(c73.667,1.266)
NetC38_2 on L1 "NONET_L01_P-001" (solid, pour order 119): 61.141,15.385 61.141,15.741 cw(c61.338,15.741) 61.338,15.938 62.223,15.938 cw(c62.223,15.75) 62.41,15.75 62.41,13.964 cw(c62.16,13.964) 62.16,13.714 59.114,13.714 cw(c59.114,13.883) 58.945,13.883 58.945,14.966 cw(c59.157,14.966) 59.157,15.178 60.934,15.178 ccw(c60.934,15.385)
NetC22_2 on L1 "NONET_L01_P-001" (solid, remove dead copper, pour order 117): 42.43,18.51 42.43,23.395 cw(c42.672,23.395) 42.672,23.637 46.446,23.637 cw(c46.446,23.146) 46.937,23.146 46.937,18.907 cw(c46.54,18.907) 46.54,18.51 44.413,18.51
NetC21_2 on L1 "NONET_L01_P-001" (solid, remove dead copper, pour order 116): 48.973,19.037 48.973,23.266 cw(c49.232,23.266) 49.232,23.525 50.661,23.525 cw(c50.661,23.246) 50.939,23.246 50.939,20.132 ccw(c51.269,20.132) 51.269,19.802 54.205,19.802 cw(c54.205,19.563) 54.444,19.563 54.444,18.7 cw(c54.273,18.7) 54.273,18.529 49.481,18.529 cw(c49.481,19.037)
GND on L2 "GND_L02_P142" (solid, remove dead copper, pour order 142): 0,-32.5 0,-16 cw(c1,-16) 1,-15 1.5,-15 ccw(c1.5,-14) 2.5,-14 2.5,14 ccw(c1.5,14) 1.5,15 1,15 cw(c1,16) 0,16 0,32.5 cw(c5,32.5) 5,37.5 95,37.5 cw(c95,32.5) 100,32.5 100,-32.5 cw(c95,-32.5) 95,-37.5 5,-37.5 cw(c5,-32.5)
NetC34_2 on L2 "NONET_L01_P-001" (solid, pour order 125): 73.644,0.222 93.355,0.222 cw(c93.355,-0.676) 94.252,-0.676 94.252,-6.675 cw(c93.463,-6.675) 93.463,-7.465 73.632,-7.465 cw(c73.632,-6.762) 72.929,-6.762 72.929,-0.494 cw(c73.644,-0.494)
LoadOut on L2 "NONET_L01_P-001" (solid, remove dead copper, pour order 90): 91.125,-17.45 93.35,-17.45 ccw(c93.35,-16.655) 94.145,-16.655 94.145,-8.279 ccw(c93.603,-8.279) 93.603,-7.737 73.626,-7.737 ccw(c73.626,-8.313) 73.05,-8.313 73.05,-14.925 cw(c72.004,-14.925) 72.004,-15.971 68.264,-15.971 ccw(c68.264,-16.981) 67.254,-16.981 67.254,-27.891 ccw(c67.935,-27.891) 67.935,-28.572 88.952,-28.572 ccw(c88.952,-27.604) 89.92,-27.604 89.92,-18.654 cw(c91.125,-18.654)
BATT+ on L2 "NONET_L01_P-001" (solid, remove dead copper, pour order 128): 89.527,27.568 89.527,18.478 cw(c88.301,18.478) 88.301,17.252 68.723,17.252 cw(c68.723,18.348) 67.627,18.348 67.627,27.815 cw(c68.512,27.815) 68.512,28.7 88.395,28.7 cw(c88.395,27.568)
VBATTSENSED on L2 "NONET_L01_P-001" (solid, remove dead copper, pour order 92): 72.903,1.266 72.903,13.99 cw(c73.727,13.99) 73.727,14.814 93.33,14.814 cw(c93.33,13.891) 94.252,13.891 94.252,1.426 cw(c93.329,1.426) 93.329,0.502 73.668,0.502 cw(c73.668,1.266)
GND on L3 "GND_L03_P141" (solid, remove dead copper, pour order 141): 0,-32.5 0,-16 cw(c1,-16) 1,-15 1.5,-15 ccw(c1.5,-14) 2.5,-14 2.5,14 ccw(c1.5,14) 1.5,15 1,15 cw(c1,16) 0,16 0,32.5 cw(c5,32.5) 5,37.5 95,37.5 cw(c95,32.5) 100,32.5 100,-32.5 cw(c95,-32.5) 95,-37.5 5,-37.5 cw(c5,-32.5)
NetC34_2 on L3 "NONET_L01_P-001" (solid, remove dead copper, pour order 136): 73.644,0.222 93.355,0.222 cw(c93.355,-0.676) 94.252,-0.676 94.252,-6.675 cw(c93.463,-6.675) 93.463,-7.465 73.632,-7.465 cw(c73.632,-6.762) 72.929,-6.762 72.929,-0.494 cw(c73.644,-0.494)
VBATTSENSED on L3 "NONET_L01_P-001" (solid, remove dead copper, pour order 132): 72.903,1.266 72.903,13.99 cw(c73.727,13.99) 73.727,14.814 93.33,14.814 cw(c93.33,13.891) 94.252,13.891 94.252,1.426 cw(c93.329,1.426) 93.329,0.502 73.668,0.502 cw(c73.668,1.266)
LoadOut on L3 "NONET_L01_P-001" (solid, remove dead copper, pour order 124): 91.125,-17.45 93.35,-17.45 ccw(c93.35,-16.655) 94.145,-16.655 94.145,-8.279 ccw(c93.603,-8.279) 93.603,-7.737 73.626,-7.737 ccw(c73.626,-8.313) 73.05,-8.313 73.05,-14.925 cw(c72.004,-14.925) 72.004,-15.971 68.264,-15.971 ccw(c68.264,-16.981) 67.254,-16.981 67.254,-27.891 ccw(c67.935,-27.891) 67.935,-28.572 88.952,-28.572 ccw(c88.952,-27.604) 89.92,-27.604 89.92,-18.654 cw(c91.125,-18.654)
BATT+ on L3 "NONET_L01_P-001" (solid, remove dead copper, pour order 139): 89.527,27.568 89.527,18.478 cw(c88.301,18.478) 88.301,17.252 68.723,17.252 cw(c68.723,18.348) 67.627,18.348 67.627,27.815 cw(c68.512,27.815) 68.512,28.7 88.395,28.7 cw(c88.395,27.568)

## Keep-outs
Keep-Out Layer:
  lines w0.2: 0,-32.5 ccw(c5,-32.5) 5,-37.5 95,-37.5 ccw(c95,-32.5) 100,-32.5 100,32.5 ccw(c95,32.5) 95,37.5 5,37.5 ccw(c5,32.5) 0,32.5 0,20.5 ccw(c1,20.5) 1,19.5 1.5,19.5 cw(c1.5,18.5) 2.5,18.5 2.5,0 2.5,-18.5 cw(c1.5,-18.5) 1.5,-19.5 1,-19.5 ccw(c1,-20.5) 0,-20.5 0,-32.5

## Other copper
L1:
  region net GND: 17.7,36.4 17.7,-37 21.5,-37 21.5,36.4

## Silkscreen, mask and mechanical layers (free items; w line width, h text height)
Top Overlay:
  drawing of 2 lines, arcs and shapes, not listed
  text "EXT" at 62.263,30.275 h1.27
  text "LED" at 64.866,30.24 h1.27
  text "SW" at 67.427,30.224 h1.27
  text "GND" at 69.563,30.224 h1.27
  text "MAX / 100A" at 84.97,29.839 h2
  text "T5" at 44.501,27.042 h2.03
  text "T4" at 52.181,27.034 h2.03
  text "T3" at 60.034,27.039 h2.03
  text "5V" at 40.724,24.469 h1.52
  text "C18" at 12.608,20.513 h1.78
  text "PACK+" at 67.451,15.693 h3.05
  text "PACK-" at 90.795,15.693 h3.05
  text "C13" at 12.608,10.514 h1.78
  text "C9" at 12.608,2.533 h1.78
  text "C9" at 12.608,-4.133 h1.78
  text "C4" at 12.608,-14.252 h1.78
  text "T2" at 69.56,-16.867 h2.03
  text "JDBJDBJDB" at 55.124,-19.393 h1.8 r45
  text "C0" at 12.608,-22.211 h1.78
  text "LOAD+" at 78.281,-27.445 h3.05 r90
  text "LOAD-" at 90.639,-27.445 h3.05 r90
  text "3V3" at 52.67,-27.786 h1.27
  text "DIO" at 55.14,-27.786 h1.27
  text "CLK" at 57.549,-27.786 h1.27
  text "GND" at 60.303,-27.786 h1.27
  text "CAN" at 48.852,-28.728 h2
  text "R" at 61.333,-34.13 h1.27
  text "USB" at 40.079,-34.84 h2
  text "R" at 85.017,-34.845 h2.03
  text "T" at 86.929,-35.105 h2.03
  text "G" at 61.286,-36.374 h1.27
  text "BT" at 90.426,-36.73 h2.03
Top Solder:
  lines w1.27: 73.776,11.291 74.505,13.584 ; 75.955,11.291 76.683,13.584 ; 90.321,11.3 91.05,13.594 ; 92.5,11.3 93.229,13.594
  text "VESC-BMS /     V4.0" at 72.527,30.438 h4
Bottom Solder:
  lines w0.1: 96.05,19.4 98.95,19.4
Mechanical 1:
  the board outline again, w0.1
Drill Drawing:
  circle w0.254: c3.591,63.04 r0.7
  circle w0.254: c3.591,47.298 r0.42
  circle w0.254: c3.591,47.298 r0.7
  lines w0.254: 2.892,51.146 4.291,51.146 3.591,49.746 2.892,51.146 ; 2.892,52.895 4.291,52.895 4.291,54.294 2.892,54.294 2.892,52.895 ; 2.892,56.043 2.892,56.393 3.241,56.743 2.892,57.093 2.892,57.443 3.241,57.443 3.591,57.093 3.941,57.443 4.291,57.443 4.291,57.093 3.941,56.743 4.291,56.393 4.291,56.043 3.941,56.043 3.591,56.393 3.241,56.043 2.892,56.043 ; 2.892,59.542 3.241,59.542 3.591,59.192 3.941,59.542 4.291,59.542 3.941,59.892 4.291,60.241 3.941,60.241 3.591,60.591 3.241,60.241 2.892,60.241 3.241,59.892 2.892,59.542 ; 2.892,65.839 3.241,65.839 3.241,65.489 3.941,65.489 3.941,65.839 4.291,65.839 4.291,66.539 3.941,66.539 3.941,66.888 3.241,66.888 3.241,66.539 2.892,66.539 2.892,65.839 ; 2.892,69.337 3.591,68.638 4.291,69.337 3.591,70.037 2.892,69.337
  lines w0.381: 1.623,45.653 127.152,45.653 ; 1.623,70.841 127.152,70.841 ; 9.719,42.505 9.719,73.99 ; 17.792,42.505 17.792,73.99 ; 32.424,42.505 32.424,73.99 ; 38.703,42.505 38.703,73.99 ; 47.844,42.505 47.844,73.99 ; 60.349,42.505 60.349,73.99 ; 67.838,42.505 67.838,73.99 ; 77.624,42.505 77.624,73.99 ; 86.222,42.505 86.222,73.99 ; 96.051,42.505 96.051,73.99 ; 111.334,42.505 111.334,73.99 ; 1.623,42.505 127.152,42.505 127.152,73.99 1.623,73.99 1.623,42.505
  text "Symbol" at 3.512,71.786 h1.83
  text "Count" at 10.664,71.786 h1.83
  text "Hole Size" at 18.737,71.786 h1.83
  text "Plated" at 33.368,71.786 h1.83
  text "Hole Type" at 39.647,71.786 h1.83
  text "Drill Layer Pair" at 48.788,71.786 h1.83
  text "Via/Pad" at 61.293,71.786 h1.83
  text "Pad Shape" at 68.783,71.786 h1.83
  text "Template" at 78.568,71.786 h1.83
  text "Description" at 87.166,71.786 h1.83
  text "Hole Tolerance (+)" at 96.995,71.786 h1.83
  text "Hole Tolerance (-)" at 112.279,71.786 h1.83
  text "2" at 10.664,68.638 h1.52
  text "0.650mm (25.59mil)" at 18.737,68.638 h1.52
  text "NPTH" at 33.368,68.638 h1.52
  text "Round" at 39.647,68.638 h1.52
  text "L1 - L4" at 48.788,68.638 h1.52
  text "Pad" at 61.293,68.638 h1.52
  text "Rounded" at 68.783,68.638 h1.52
  text "c65hn65" at 78.568,68.638 h1.52
  text "4" at 10.664,65.489 h1.52
  text "0.600mm (23.62mil)" at 18.737,65.489 h1.52
  text "PTH" at 33.368,65.489 h1.52
  text "Slot" at 39.647,65.489 h1.52
  text "L1 - L4" at 48.788,65.489 h1.52
  text "Pad" at 61.293,65.489 h1.52
  text "Rounded" at 68.783,65.489 h1.52
  text "(Mixed)" at 78.568,65.489 h1.52
  text "4" at 10.664,62.34 h1.52
  text "1.000mm (39.37mil)" at 18.737,62.34 h1.52
  text "PTH" at 33.368,62.34 h1.52
  text "Round" at 39.647,62.34 h1.52
  text "L1 - L4" at 48.788,62.34 h1.52
  text "Pad" at 61.293,62.34 h1.52
  text "(Mixed)" at 68.783,62.34 h1.52
  text "(Mixed)" at 78.568,62.34 h1.52
  text "4" at 10.664,59.192 h1.52
  text "3.200mm (125.98mil)" at 18.737,59.192 h1.52
  text "PTH" at 33.368,59.192 h1.52
  text "Round" at 39.647,59.192 h1.52
  text "L1 - L4" at 48.788,59.192 h1.52
  text "Pad" at 61.293,59.192 h1.52
  text "Rounded" at 68.783,59.192 h1.52
  text "c700h320" at 78.568,59.192 h1.52
  text "6" at 10.664,56.043 h1.52
  text "1.199mm (47.20mil)" at 18.737,56.043 h1.52
  text "PTH" at 33.368,56.043 h1.52
  text "Round" at 39.647,56.043 h1.52
  text "L1 - L4" at 48.788,56.043 h1.52
  text "Pad" at 61.293,56.043 h1.52
  text "Rounded" at 68.783,56.043 h1.52
  text "(Mixed)" at 78.568,56.043 h1.52
  text "16" at 10.664,52.895 h1.52
  text "1.900mm (74.80mil)" at 18.737,52.895 h1.52
  text "PTH" at 33.368,52.895 h1.52
  text "Round" at 39.647,52.895 h1.52
  text "L1 - L4" at 48.788,52.895 h1.52
  text "Pad" at 61.293,52.895 h1.52
  text "Rounded" at 68.783,52.895 h1.52
  text "c290h190" at 78.568,52.895 h1.52
  text "451" at 10.664,49.746 h1.52
  text "0.300mm (11.81mil)" at 18.737,49.746 h1.52
  text "PTH" at 33.368,49.746 h1.52
  text "Round" at 39.647,49.746 h1.52
  text "L1 - L4" at 48.788,49.746 h1.52
  text "Via" at 61.293,49.746 h1.52
  text "Rounded" at 68.783,49.746 h1.52
  text "(Mixed)" at 78.568,49.746 h1.52
  text "580" at 10.664,46.598 h1.52
  text "0.400mm (15.75mil)" at 18.737,46.598 h1.52
  text "PTH" at 33.368,46.598 h1.52
  text "Round" at 39.647,46.598 h1.52
  text "L1 - L4" at 48.788,46.598 h1.52
  text "Via" at 61.293,46.598 h1.52
  text "Rounded" at 68.783,46.598 h1.52
  text "(Mixed)" at 78.568,46.598 h1.52
  text "1067 Total" at 10.664,43.449 h1.52
  text "Slot definitions :" at 3.512,41.245 h1.52
  text "Routed Path Length" at 13.875,41.245 h1.52
  text "= Calculated from tool start centre position to tool end centre position." at 26.719,41.245 h1.52
  text "Hole Length" at 13.875,39.986 h1.52
  text "= Routed Path Length + Tool Size = Slot length as defined in the PCB layout" at 21.952,39.986 h1.52